# Altium PCB MyFirstDEsign-LDO-PCB.PcbDoc
Units mil, origin at the board's own origin, x right, y up, seen from the top; angles counter-clockwise.
Board outline 1279.53 x 393.7 mil, 2 copper layers (Top Layer, Bottom Layer); 5 components, 3 nets, 17 pads, 5 vias.
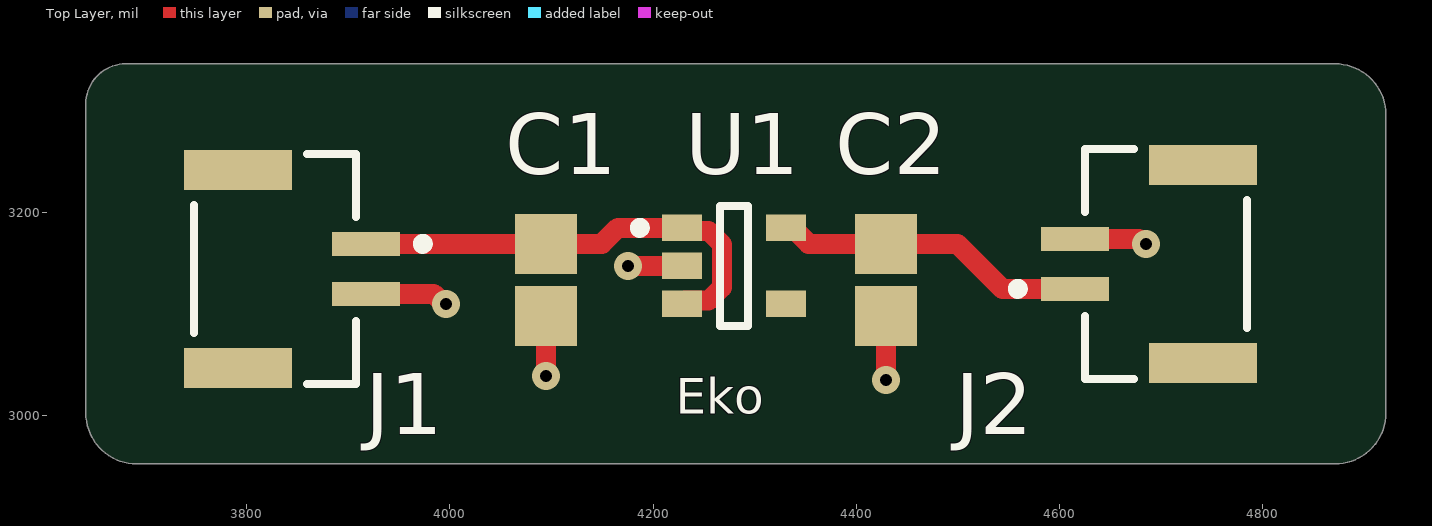
[diagram p0: Top Layer view]
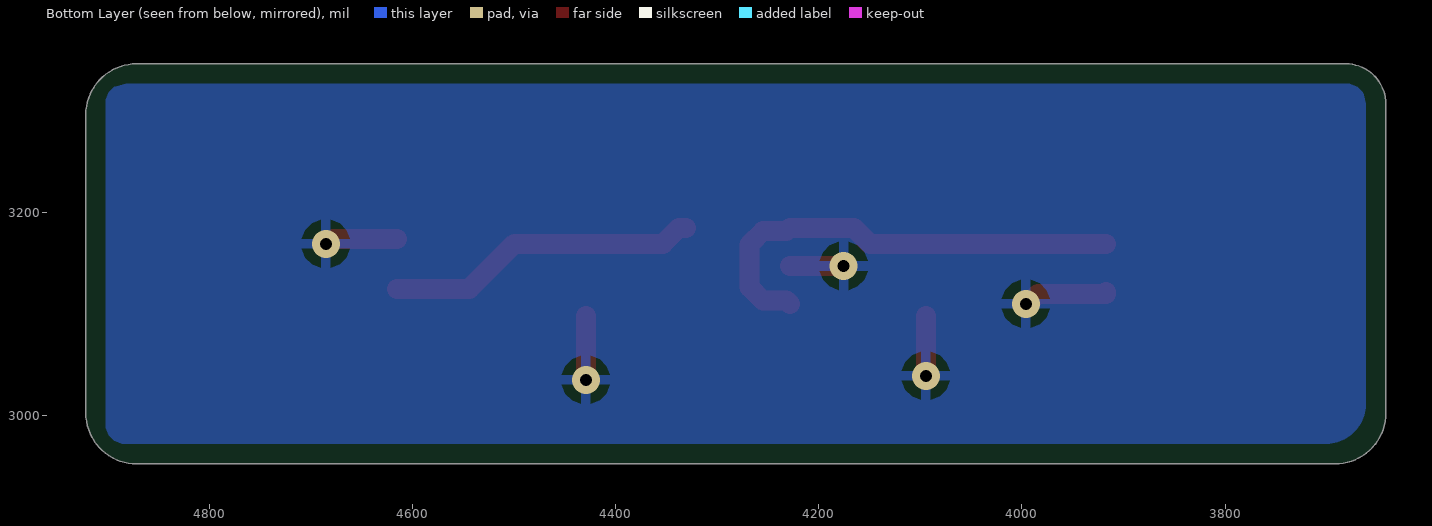
[diagram p1: Bottom Layer view, seen from below]
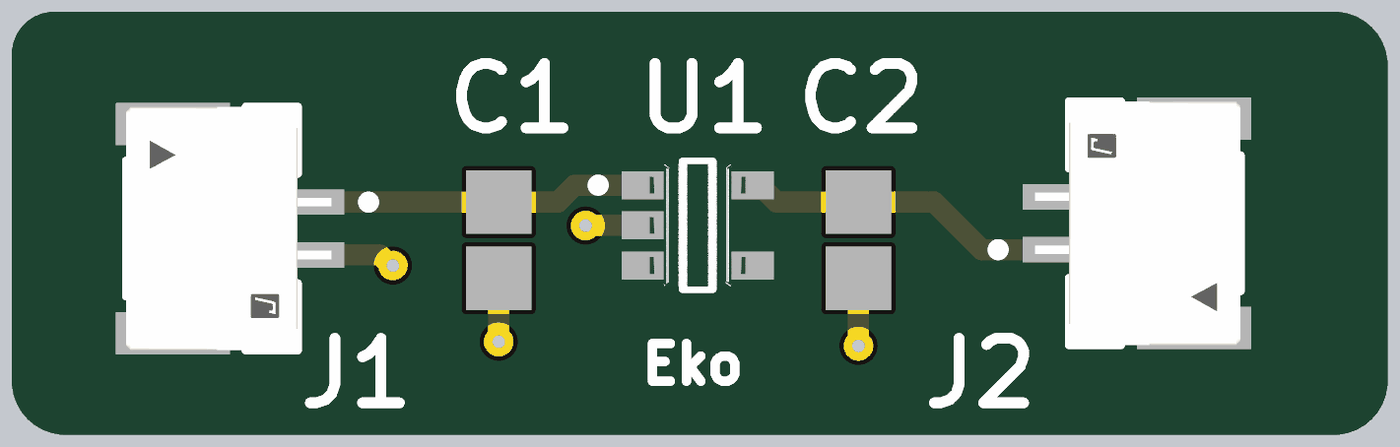
[diagram p2: 3D render of the assembled board from above, using the file's embedded part models]

## Layer stack, top to bottom
Top Solder: solder mask 0.4, Solder Resist, Dk 3.5
Top Layer: signal copper 1.4
Dielectric 1: dielectric 12.6, FR-4, Dk 4.8
Bottom Layer: signal copper 1.4
Bottom Solder: solder mask 0.4, Solder Resist, Dk 3.5

## Board outline
3641.73,3002.76 3641.73,3307.09 cw(c3681.1,3307.09) 3681.1,3346.46 4871.26,3346.46 cw(c4871.26,3296.46) 4921.26,3296.46 4921.26,3002.76 cw(c4871.26,3002.76) 4871.26,2952.76 3691.73,2952.76 cw(c3691.73,3002.76)

## Design rules (kind name [scope] priority, off if disabled: settings)
Clearance [All] p1: gap=10 ignorepadtopadclearanceinfootprint=FALSE
PolygonConnect [All] p1: connectstyle=Relief reliefconductorwidth=10 reliefentries=4 polygonreliefangle="90 Angle" airgapwidth=10
RoutingVias [All] p1: holewidth=28 width=50 viastyle="Through Hole" minholewidth=28 minwidth=50 maxholewidth=28 maxwidth=50
SolderMaskExpansion [All] p1: expansion=4 istentingtop=FALSE
SupplyNets "Schematic Supply Nets_2" [InNet('+3V3')] p1: voltage=0.000
SupplyNets "Schematic Supply Nets_1" [InNet('+5V')] p2: voltage=0.000
SupplyNets "Schematic Supply Nets" [InNet('GND')] p3: voltage=0.000
Width [All] p1: maxlimit=19.68 minlimit=10 preferedwidth=11.81 minimp=50.000000 maximp=50.000000 favimp=50.000000
30 further rules are at their usual default settings.

## Components (designator, comment, footprint, x,y, rotation, side; value= is the part's Value field where it differs from the comment)
C1 "C0805C105K8RACTU" CAPC2013X100X50ML20T25 4094.49,3133.86 r90 top
C2 "C0805C105K8RACTU" CAPC2013X100X50ML20T25 4429.13,3133.86 r270 top
J1 "SM02B-GHS-TB(LF)(SN)" FP-SM02B-GHS-TB_LF_SN-MFG 3827.76,3144.68 r270 top
J2 "SM02B-GHS-TB(LF)(SN)" FP-SM02B-GHS-TB_LF_SN-MFG 4704.72,3149.61 r90 top
U1 "MIC5317-3.3YM5-TR" FP-SOT23-5LD-PL-1-MFG 4279.53,3147.64 r0 top

## Footprints (in the part's own frame and the unit in brackets; to place one, negate y for a bottom-side part, rotate by r counter-clockwise, add the part's x,y. Pads: shape width x height; smd on the part's side, far side on the other; paste and mask are expansions set on the pad)
CAPC2013X100X50ML20T25 [mm] "Chip Capacitor, 2-Leads, Body 2.00x1.25mm, IPC Low Density"
  rect 1.5x1.55 smd: 1(-0.9,0) 2(0.9,0)
  body extent -1.1,-0.72 1.1,0.72, height 1
FP-SM02B-GHS-TB_LF_SN-MFG [mm]
  rect 0.6x1.7 smd paste+0 mask+0: 1(-0.625,2.275) 2(0.625,2.275)
  rect 1x2.7 smd paste+0 mask+0: 3(-2.475,-0.925) 4(2.475,-0.925)
  silkscreen extent -2.88,-2.02 2.88,3.83, body extent -3.08,-2.37 3.08,3.22, height 0.25
FP-SOT23-5LD-PL-1-MFG [mm]
  rect 1x0.66 smd paste+0 mask+0: 1(-1.3,0.95) 2(-1.3,0) 3(-1.3,-0.95) 4(1.3,-0.95) 5(1.3,0.95)
  silkscreen extent -2.47,-1.5 0.35,1.5, body extent -1.9,-1.6 1.9,1.6, height 0.25

## Part data
C1 C2: library part CMP-2007-03676-1, Manufacturer=Kemet, Part Number=C0805C105K8RACTU
J1 J2: library part CMP-2000-07076-2, "CONN HEADER SMD R/A 2POS 1.25MM", Color=Natural, Current Rating=1A, Package Quantity=2500, Voltage Rating=50V, Connector Type="Outer Shroud Contact", Contact Material=Bronze, Contact Plating=Tin, Contact Type="Male Pin", Fastening Type=Latch, Housing Color=Natural, Housing Material=Nylon, Lead Free="Lead Free", Mount="Surface Mount", Number of Contacts=2, Number of Positions=2, Number of Rows=1, Orientation="Right Angle", Packaging="Tape and Reel", Pitch=0.049inch, Series=GH, Termination=Solder
U1: library part CMP-06324-000116-1, "IC REG LINEAR 3.3V 150MA SOT23-5", Case/Package=SOT-23-5, Dropout Voltage=155mV, Max Input Voltage=6V, Max Operating Temperature=125°C, Min Current Limit=200mA, Min Input Voltage=2.5V, Min Operating Temperature=-40°C, Output Current=150mA, Output Voltage=3.3V, Package Quantity=3000, Power Supply Rejection Ratio (PSRR)=70dB, Mount="Surface Mount", Number of Outputs=1, Number of Regulators=1, Packaging="Tape and Reel", RoHS Compliant=No, Series=-

## Via types
v1: diameter 27.56, hole 11.81, Top Layer to Bottom Layer, 5 vias

## Nets (pads, with @x,y where several pads share a name; then routed paths per layer and width w, separated by ;. In a path a pad name is that pad's centre, name@x,y a point inside that pad or via, vN(x,y) a via of type N, cw(c..) or ccw(c..) an arc to the next point about the centre after c; other vN are vias at no path point)
+3V3: C2.1 J2.1 U1.5 | length 309.3
  Top Layer w19.68: U1.5 4337.4,3185.04 4353.15,3169.29 C2.1 4499.51,3169.29 4543.8,3125 J2.1
+5V: C1.2 J1.1 U1.1 U1.3 | length 452.4
  Top Layer w19.68: J1.1 C1.2 4149.62,3169.29 4165.36,3185.04 U1.1 4231.5,3181.89 4254.83,3181.89 4267.87,3168.85 4267.87,3126.43 4254.83,3113.39 4231.5,3113.39 U1.3
GND: C1.1 C2.2 J1.2 J2.2 U1.2 | length 331.2
  Top Layer w19.68: J1.2 3984.09,3120.08 3993.93,3110.24 v1(3996.06,3110.24) ; J1.2@3917.32,3122.05 J1.2@3918.31,3121.06 ; v1(4094.49,3039.37) C1.1 ; v1(4175.35,3147.48) 4175.43,3147.56 U1.2 U1.2 ; v1(4429.13,3035.43) C2.2 ; J2.2 4615.32,3174.05 4678.15,3174.05 4682.91,3169.29 v1(4685.04,3169.29)
pads on no net: J1.3 J1.4 J2.3 J2.4 U1.4

## Polygon pours and split planes (outlines as drawn)
GND on Bottom Layer "GND_L02_P001" (solid, pour order 1): 3661.42,3307.09 3661.42,3011.81 ccw(c3700.79,3011.81) 3700.79,2972.44 4881.89,2972.44 ccw(c4881.89,2992.13) 4901.57,2992.13 4901.57,3307.09 ccw(c4881.89,3307.09) 4881.89,3326.77 3681.1,3326.77 ccw(c3681.1,3307.09)

## Silkscreen, mask and mechanical layers (free items; w line width, h text height)
Top Overlay:
  text "Eko" at 4222.6,3002.13 h35
Mechanical 1:
  the board outline again, w10